# Altium PCB Picc.PcbDoc
Units mil, origin at the board's own origin, x right, y up, seen from the top; angles counter-clockwise.
Board outline 3311.05 x 1003.97 mil, 2 copper layers (Top Layer, Bottom Layer); 30 components, 19 nets, 88 pads, 2 vias.
Unrouted connection lines stored in the file: 4.
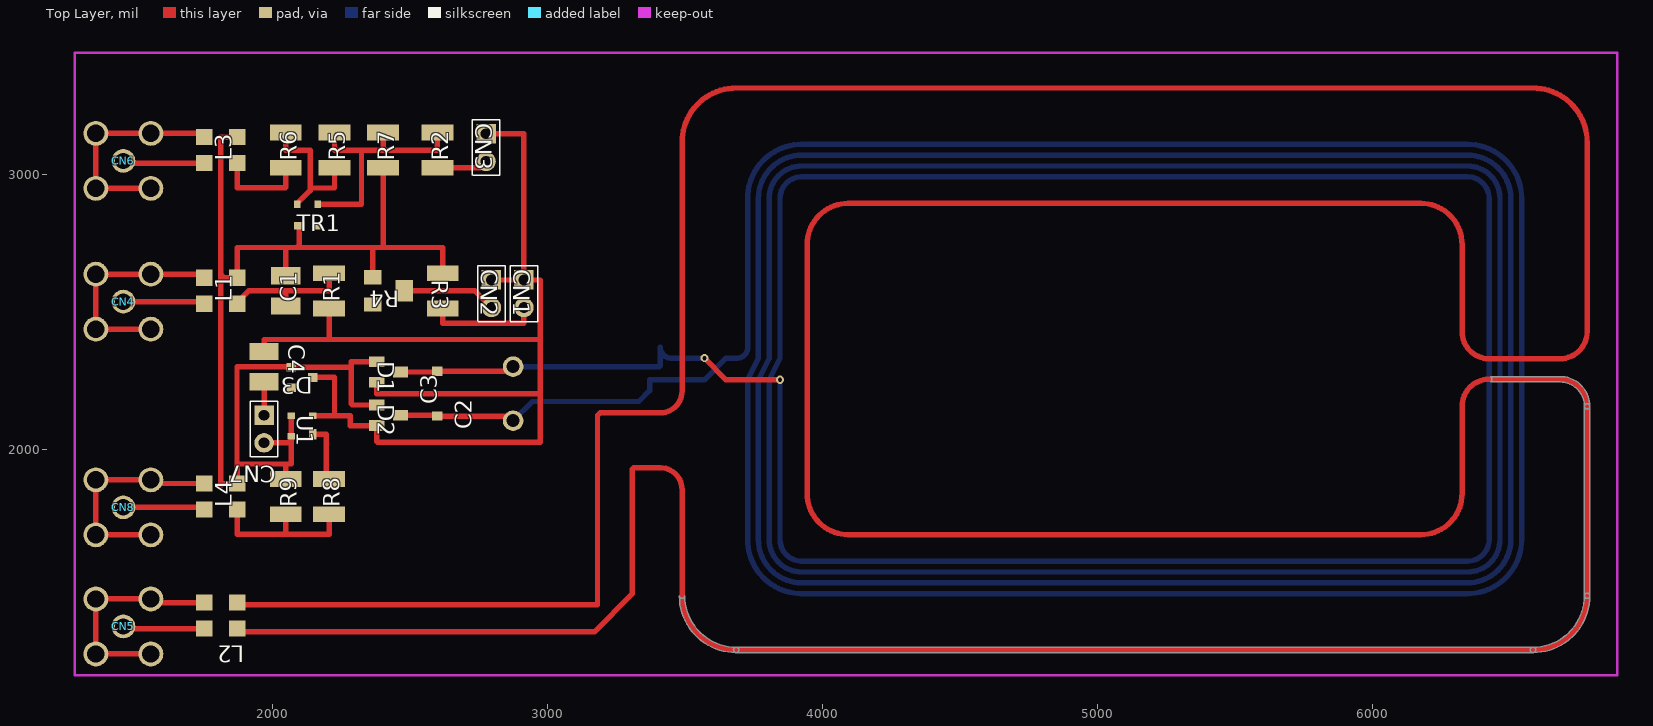
[diagram p0: Top Layer view]
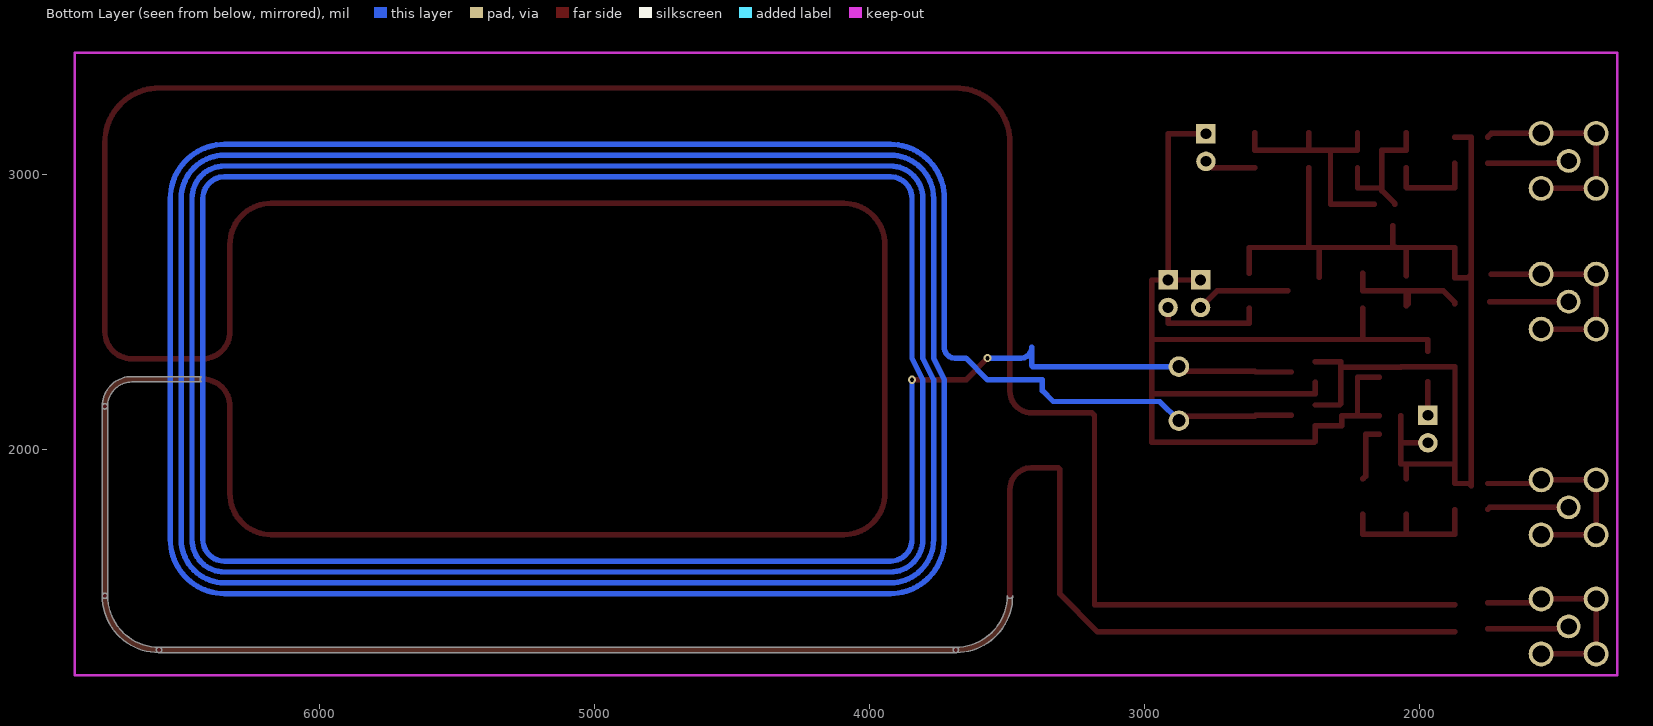
[diagram p1: Bottom Layer view, seen from below]

## Layer stack, top to bottom
Top Solder: solder mask 0.4, Solder Resist, Dk 3.5
Top Layer: signal copper 1.4
Dielectric 1: dielectric 12.6, FR-4, Dk 4.8
Bottom Layer: signal copper 1.4
Bottom Solder: solder mask 0.4, Solder Resist, Dk 3.5

## Board outline
3478.61,1469.68 ccw(c3488.46,1469.68) 3498.32,1469.68 ccw(c3685.32,1469.68) 3685.31,1282.69 6582.95,1282.69 cw(c6582.95,1272.83) 6592.81,1272.83 cw(c6582.95,1272.83) 6583,1262.98 ccw(c6582.95,1469.69) 6789.66,1469.68 6789.66,2158.66 ccw(c6681.38,2158.66) 6681.38,2266.94 6428.52,2266.94 6428.52,2265.57 cw(c6423.5,2257.09) 6433.36,2257.09 cw(c6423.5,2257.09) 6428.52,2248.6 6428.52,2247.23 6681.38,2247.23 cw(c6681.38,2158.66) 6769.95,2158.66 ccw(c6779.8,2158.66) 6789.66,2158.66 ccw(c6779.8,2158.66) 6769.95,2158.66 6769.95,1469.68 ccw(c6779.8,1469.68) 6789.66,1469.68 6789.66,1469.69 ccw(c6779.8,1469.69) 6769.95,1469.69 6769.95,1469.68 cw(c6582.95,1469.69) 6582.95,1282.69 ccw(c6582.95,1272.83) 6582.91,1282.69 ccw(c6582.95,1272.83) 6582.95,1262.98 ccw(c6582.95,1469.69) 6583,1262.98 cw(c6582.95,1272.83) 6582.95,1262.98 3685.31,1262.98 cw(c3685.31,1272.83) 3685.31,1282.69 3685.32,1282.69 cw(c3685.32,1272.83) 3695.17,1272.83 cw(c3685.32,1272.83) 3685.32,1262.98 3685.31,1262.98 cw(c3685.32,1469.68)

## Design rules (kind name [scope] priority, off if disabled: settings)
Clearance [All] p1: gap=10
PolygonConnect [All] p1: connectstyle=Relief reliefconductorwidth=10 reliefentries=4 polygonreliefangle="90 Angle" airgapwidth=10
RoutingVias [All] p1: holewidth=28 width=50 viastyle="Through Hole" minholewidth=28 minwidth=50 maxholewidth=28 maxwidth=50
SolderMaskExpansion [All] p1: expansion=4
Width [All] p1: maxlimit=39.37 minlimit=10 preferedwidth=19.68 minimp=50.000000 maximp=50.000000 favimp=50.000000
29 further rules are at their usual default settings.

## Components (designator, comment, footprint, x,y, rotation, side; value= is the part's Value field where it differs from the comment)
C1 "1nF" C_1210 2047.24,2578.74 r90 top
C2 "GKGXXX15" GKGXXX15 2874.02,2204.72 r90 top
C3 "TZC3" TZC3 2598.43,2204.72 r90 top
C4 "27pF" C_1210 1968.5,2303.15 r270 top
CN1 "C_2" "2x1 Pin Array" 2913.39,2618.11 r270 top
CN2 "C_2" "2x1 Pin Array" 2795.28,2618.11 r270 top
CN3 "C_2" "2x1 Pin Array" 2775.59,3149.61 r270 top
CN4 "Conector SMA" "Conector SMA" 1456.69,2539.37 r90 top
CN5 "Conector SMA" "Conector SMA" 1456.69,1358.27 r90 top
CN6 "Conector SMA" "Conector SMA" 1456.69,3051.18 r90 top
CN7 "C_2" "2x1 Pin Array" 1968.5,2125.98 r270 top
CN8 "Conector SMA" "Conector SMA" 1456.69,1791.34 r90 top
D1 "BAR43S" BAR43S 2421.26,2283.46 r270 top
D2 "BAR43S" BAR43S 2421.26,2125.98 r270 top
D3 "BZX84" BZX84 2106.3,2263.78 r270 top
L1 "ACM3225-2520-2P" ACM3225.2520-2P 1811.02,2578.74 r180 top
L2 "ACM3225-2520-2P" ACM3225.2520-2P 1811.02,1397.64 r180 top
L3 "ACM3225-2520-2P" ACM3225.2520-2P 1811.02,3090.55 r180 top
L4 "ACM3225-2520-2P" ACM3225.2520-2P 1811.02,1830.71 r180 top
R1 "51k" R_1210 2204.72,2578.74 r90 top
R2 "51" R_1210 2598.43,3090.55 r90 top
R3 "1K8" R_1210 2618.11,2578.74 r270 top
R4 "Rvar" "BOURNS 3224W" 2421.26,2578.74 r180 top
R5 "500K" R_1210 2224.41,3090.55 r270 top
R6 "110K" R_1210 2047.24,3090.55 r270 top
R7 "1K5" R_1210 2401.57,3090.55 r90 top
R8 "220" R_1210 2204.72,1830.71 r270 top
R9 "51" R_1210 2047.24,1830.71 r90 top
TR1 "BSS83" BSS83 2125.98,2854.33 r0 top
U1 "BCV61A" BCV61A 2106.3,2086.61 r90 top

## Footprints (in the part's own frame and the unit in brackets; to place one, negate y for a bottom-side part, rotate by r counter-clockwise, add the part's x,y. Pads: shape width x height; smd on the part's side, far side on the other; paste and mask are expansions set on the pad)
"2x1 Pin Array" [mm]
  rect 1.8x1.8 hole 1: 1(0,0)
  round 1.8 hole 1: 2(2.54,0)
  silkscreen extent -1.31,-1.27 3.84,1.27
ACM3225.2520-2P [mm]
  rect 1.55x1.5 smd: 0(-1.525,1.2) 1(-1.525,-1.2) 2(1.525,1.2) 3(1.525,-1.2)
  body extent -1.6,-1.25 1.6,1.25, height 2.3
BAR43S [mm]
  rect 1x1.4 smd: 1(-0.95,-1.1) 2(0.95,-1.1) 3(0,1.1)
  body extent -1.48,-1.25 1.52,1.25, height 1.05
BCV61A [mm]
  rect 1x0.7 smd: 1(-0.75,-1)
  rect 0.6x0.7 smd: 2(0.95,-1) 3(0.95,1) 4(-0.95,1)
  body extent -1.5,-1.25 1.5,1.25, height 1.1
"BOURNS 3224W" [mm]
  rect 1.6x1.3 smd: 1(1.45,-1.25) 2(1.45,1.25)
  rect 1.6x2 smd: 3(-1.45,0)
  body extent -1.97,-2.41 1.97,2.41, height 5.29
BSS83 [mm]
  rect 1x0.7 smd: 1(-0.75,-1)
  rect 0.6x0.7 smd: 2(0.95,-1) 3(0.95,1) 4(-0.95,1)
  body extent -1.5,-1.25 1.5,1.25, height 1.1
BZX84 [mm]
  rect 0.8x0.9 smd: 1(-0.95,-1) 2(0.95,-1) 3(0,1)
  body extent -1.48,-1.25 1.52,1.25, height 1.05
C_1210 [mm]
  rect 1.6x2.7 smd: 1(1.4,0) 2(-1.4,0)
  body extent -1.6,-1.25 1.6,1.26, height 0.53
"Conector SMA" [mm]
  round 2.2 hole 1.5: 0(0,0)
  round 2.3 hole 1.6: 1(-2.54,-2.54) 1(-2.54,2.54) 1(2.54,-2.54) 1(2.54,2.54)
  body extent -3.17,-3.05 3.17,11.15, height 11.18
GKGXXX15 [mm]
  round 1.9 hole 1.2: 0(2.5,0) 1(-2.5,0)
R_1210 [mm]
  rect 1.45x2.95 smd: 1(1.625,0) 2(-1.625,0)
  body extent -1.6,-1.25 1.6,1.26, height 0.53
TZC3 [mm]
  rect 0.85x1 smd: 0(2.075,0) 1(-2.075,0)
  body extent -2.25,-1.6 2.35,1.6, height 1.6

## Part data
C1 C4: library part Cap, "Ceramic Capacitor"
C2: "10"
CN1 CN2 CN3 CN4 CN5 CN6 CN7 CN8: "Conector 2 pines"
R1 R2 R3 R5 R6 R7 R8 R9: library part R, "Chip Resistor"
R4: "SMD Potentiometer"

## Via types
v1: diameter 29.53, hole 15.75, Top Layer to Bottom Layer, 2 vias

## Nets (pads, with @x,y where several pads share a name; then routed paths per layer and width w, separated by ;. In a path a pad name is that pad's centre, name@x,y a point inside that pad or via, vN(x,y) a via of type N, cw(c..) or ccw(c..) an arc to the next point about the centre after c; other vN are vias at no path point)
GND: CN4.1 CN5.1 CN6.1 CN8.1 L1.3 L2.3 L3.3 L4.3 | length 3180.4
  Top Layer w19.68: CN5.1@1556.69,1258.27 1356.69,1258.27 1356.69,1458.27 1556.69,1458.27 1570.08,1444.88 L2.3 ; CN8.1@1556.69,1691.34 1356.69,1691.34 1356.69,1891.34 1556.69,1891.34 1570.08,1877.95 L4.3 ; CN4.1@1556.69,2439.37 1356.69,2439.37 1356.69,2639.37 1556.69,2639.37 L1.3@1737.6,2639.37 ; CN6.1@1556.69,2951.18 1356.69,2951.18 1356.69,3151.18 1556.69,3151.18 1737.6,3151.18 L3.3
NetC1_1: C1.1 CN7.2 D1.1 D2.1 D3.1 L1.1 L3.1 L4.1 R3.2 R4.1 R7.2 R9.1 TR1.1 TR1.2 U1.3 U1.4 | length 4735.6
  Top Layer w19.68: 1811.02,2637.8 1822.83,2625.98 L1.1 1871.06,2736.22 2047.24,2736.22 ; L3.1 1811.02,3137.8 1811.02,1870.08 1818.9,1877.95 L4.1 1871.06,1948.82 ; CN7.2 2065.35,2025.98 2066.93,2027.56 ; R9.1 2047.24,1948.82 ; C1.1 2047.24,2736.22 ; U1.3 U1.4 2066.93,2027.56 ; TR1.1 2096.46,2746.06 2086.61,2736.22 ; R4.1 2364.17,2736.22 ; D2.1 2289.37,2163.39 2285.43,2167.32 2285.43,2303.15 ; D1.1 2285.43,2320.87 2285.43,2303.15 ; R7.2 2401.57,2736.22 2364.17,2736.22 ; R3.2 2618.11,2736.22 2364.17,2736.22 ; 1871.06,1948.82 1870.08,1948.82 1870.08,2303.15 2064.96,2303.15 D3.1 2283.46,2301.18 2285.43,2303.15 ; 1871.06,1948.82 2047.24,1948.82 ; 2047.24,1948.82 2066.93,1948.82 2066.93,2027.56 ; 2047.24,2736.22 2086.61,2736.22 ; 2086.61,2736.22 2364.17,2736.22
NetC1_2: C1.2 L1.0 R1.1 | length 515.4
  Top Layer w19.68: L1.0 1871.06,2537.88 1911.92,2578.74 2039.37,2578.74 C1.2@2039.37,2531.5 ; C1.2 2047.24,2578.74 2204.72,2578.74 R1.1
NetC2_0: C2.0 C2.1 C3.0 C3.1 D1.3 D2.3 | length 35582.1
  Top Layer w19.68: D2.3 2595.47,2125.98 C3.1 2857.28,2123.03 C2.1 ; D1.3 2595.47,2283.46 C3.0 2857.28,2286.42 C2.0 ; v1(3569.76,2333.86) 3647.87,2255.12 v1(3844.76,2255.12)
  Bottom Layer w19.68: C2.1 2944.09,2176.38 3330.98,2176.38 3370.35,2215.75 3370.35,2255.12 3569.76,2255.12 3648.5,2333.86 3687.87,2333.86 ccw(c3687.87,2373.23) 3727.24,2373.23 ; C2.0 3405.51,2303.15 3409.72,2307.36 3409.72,2373.23 ccw(c3449.09,2373.23) 3449.09,2333.86 v1(3569.76,2333.86) ; 3726.65,2373.23 3726.65,2914.57 cw(c3923.5,2914.57) 3923.5,3111.42 6344.76,3111.42 cw(c6344.76,2914.57) 6541.61,2914.57 6541.61,1674.41 cw(c6344.76,1674.41) 6344.76,1477.56 3923.5,1477.56 cw(c3923.5,1674.41) 3726.65,1674.41 3726.65,2255.12 3766.02,2333.86 3766.02,2914.57 cw(c3923.5,2914.57) 3923.5,3072.05 6344.76,3072.05 cw(c6344.76,2914.57) 6502.24,2914.57 6502.24,1674.41 cw(c6344.76,1674.41) 6344.76,1516.93 3923.5,1516.93 cw(c3923.5,1674.41) 3766.02,1674.41 ; 3766.02,1672.64 3766.02,2255.12 3805.39,2333.86 3805.39,2914.57 cw(c3923.5,2914.57) 3923.5,3032.68 6344.76,3032.68 cw(c6344.76,2914.57) 6462.87,2914.57 6462.87,1674.41 cw(c6344.76,1674.41) 6344.76,1556.3 3923.5,1556.3 cw(c3923.5,1674.41) 3805.39,1674.41 3805.39,2255.12 3844.76,2333.86 3844.76,2914.57 cw(c3923.5,2914.57) 3923.5,2993.31 6344.76,2993.31 cw(c6344.76,2914.57) 6423.5,2914.57 6423.5,1674.41 cw(c6344.76,1674.41) 6344.76,1595.67 3923.5,1595.67 cw(c3923.5,1674.41) 3844.76,1674.41 v1@3844.76,2249.29
NetC4_1: C4.1 CN7.1 | length 122
  Top Layer w19.68: CN7.1 C4.1
NetC4_2: C4.2 CN1.1 CN2.1 CN3.1 D1.2 D2.2 D3.3 R1.2 U1.2 | length 4372.7
  Top Layer w19.68: C4.2 1968.5,2401.57 2204.72,2401.57 ; U1.2 2224.41,2124.02 ; D3.3 2224.41,2263.78 2224.41,2124.02 ; R1.2 2204.72,2401.57 ; D1.2 2377.95,2204.72 2972.44,2204.72 ; CN3.1 2913.39,3149.61 CN1.1 ; CN2.1 CN1.1 ; 2204.72,2401.57 2972.44,2401.57 ; 2224.41,2124.02 2281.5,2124.02 2281.5,2088.58 D2.2 2377.95,2031.5 2381.89,2027.56 2401.57,2027.56 2972.44,2027.56 2972.44,2204.72 ; CN1.1 2972.44,2618.11 2972.44,2401.57 ; 2972.44,2204.72 2972.44,2401.57
NetCN1_2: CN1.2 R3.1 | length 406.9
  Top Layer w19.68: R3.1 2618.11,2460.63 2913.39,2460.63 CN1.2
NetCN2_2: CN2.2 R4.3 | length 342
  Top Layer w19.68: R4.3 2734.65,2578.74 CN2.2
NetCN3_2: CN3.2 R2.2 | length 186.7
  Top Layer w19.68: R2.2 2752.56,3026.57 CN3.2
NetCN4_0: CN4.0 L1.2 | length 286.4
  Top Layer w19.68: CN4.0 L1.2@1743.11,2539.37
NetCN5_0: CN5.0 L2.2 | length 297.6
  Top Layer w19.68: CN5.0 1464.57,1350.39 L2.2
NetCN6_0: CN6.0 L3.2 | length 297.6
  Top Layer w19.68: CN6.0 1464.57,3043.31 L3.2
NetCN8_0: CN8.0 L4.2 | length 297.6
  Top Layer w19.68: CN8.0 1743.11,1791.34 L4.2
NetL2_0: L2.0 L2.1 | length 22010.8
  Top Layer w19.68: L2.0@1871.06,1338.58 3169.29,1338.58 3307.09,1476.38 3307.09,1929.13 3312.99,1935.04 3409.72,1935.04 cw(c3409.72,1856.3) 3488.46,1856.3 3488.46,1469.68 ccw(c3685.32,1469.68) 3685.32,1272.83 6582.95,1272.83 ccw(c6582.95,1469.69) 6779.8,1469.69 6779.8,2158.66 ccw(c6681.38,2158.66) 6681.38,2257.09 6423.5,2257.09 ccw(c6423.5,2158.66) 6325.08,2158.66 6325.08,1841.73 cw(c6175.47,1841.73) 6175.47,1692.13 4092.8,1692.13 cw(c4092.8,1841.73) 3943.19,1841.73 3943.19,2747.24 cw(c4092.8,2747.24) 4092.8,2896.85 6175.47,2896.85 cw(c6175.47,2747.24) 6325.08,2747.24 6325.08,2430.32 ccw(c6423.5,2430.32) 6423.5,2331.89 6681.38,2331.89 ccw(c6681.38,2430.32) 6779.8,2430.32 6779.8,3119.29 ccw(c6582.95,3119.29) 6582.95,3316.14 3685.31,3316.14 ccw(c3685.32,3119.29) 3488.46,3119.29 3488.46,2213.78 cw(c3409.72,2213.78) 3409.72,2135.04 3190.16,2135.04 3181.1,2125.98 3181.1,1437.01 L2.1@1871.06,1437.01
NetL3_0: L3.0 R6.1 | length 338
  Top Layer w19.68: L3.0 1871.06,2953.74 2046.26,2953.74 2047.24,2954.72 R6.1
NetL4_0: L4.0 R8.1 R9.2 | length 571.9
  Top Layer w19.68: L4.0 1871.06,1692.91 2204.72,1692.91 R8.1 ; 2047.24,1692.91 R9.2
NetR2_1: R2.1 R5.2 R7.1 TR1.3 | length 922.2
  Top Layer w19.68: TR1.3 2322.83,2893.7 2322.83,3090.55 ; R5.2 2224.41,3090.55 2322.83,3090.55 ; R7.1 2401.57,3090.55 ; R2.1 2598.43,3090.55 2401.57,3090.55 ; 2322.83,3090.55 2401.57,3090.55
NetR5_1: R5.1 R6.2 TR1.4 | length 531.4
  Top Layer w19.68: R6.2 2047.24,3090.55 2135.83,3090.55 2135.83,2952.76 ; TR1.4 2088.58,2895.67 2135.83,2942.91 2135.83,2952.76 ; R5.1 2224.41,2952.76 2135.83,2952.76
NetR8_2: R8.2 U1.1 | length 215.7
  Top Layer w19.68: U1.1 2194.88,2057.09 2194.88,1904.53 R8.2
pads on no net: D3.2 R4.2

## Keep-outs
Keep-Out Layer:
  lines w10: 1279.53,1181.1 1279.53,3444.88 6889.76,3444.88 6889.76,1181.1 1279.53,1181.1

## Silkscreen, mask and mechanical layers (free items; w line width, h text height)
Mechanical 1:
  lines w3.94: 3825.08,2176.18 3825.08,2446.18
  lines w10: 3569.76,2333.86 3569.76,2255.12 3609.13,2294.49 3648.5,2333.86 ; 3648.5,2294.49 3687.87,2333.86 ; 3726.65,2316.18 3726.65,2394.92 3726.65,2434.29 ; 3746.34,2296.5 3785.71,2296.5 3825.08,2296.5 ; 3844.76,1966.18 3844.76,2636.18 ; 3844.76,2255.12 3488.46,2255.12 3488.46,2294.49 3488.46,2333.86 3844.76,2333.86 ; 4817.87,2993.31 5372.87,2993.31 ; 4862.87,1595.67 5522.87,1595.67 ; 6423.5,1886.18 6423.5,2721.18 ; 3575.08,3357.48 ccw(c3575.08,3231.5) 3449.09,3231.5 3449.09,3140.94 3449.09,1448.03 3449.09,1357.48 ccw(c3575.08,1357.48) 3575.08,1231.5 6693.19,1231.5 ccw(c6693.19,1357.48) 6819.17,1357.48 6819.17,3231.5 ccw(c6693.19,3231.5) 6693.19,3357.48 ; 3575.08,3357.48 6693.19,3357.48 ; 3575.08,3357.48 6693.19,3357.48 ; 3844.76,2333.86 3805.39,2333.86 3805.39,2294.49 3805.39,2255.12 3844.76,2333.86